# Altium PCB STM32F103C8T6核心板.PcbDoc
Units mm, origin at the board's own origin, x right, y up, seen from the top; angles counter-clockwise.
Board outline 53.34 x 21.36 mm, 2 copper layers (Top Layer, Bottom Layer); 35 components, 50 nets, 168 pads, 26 vias.
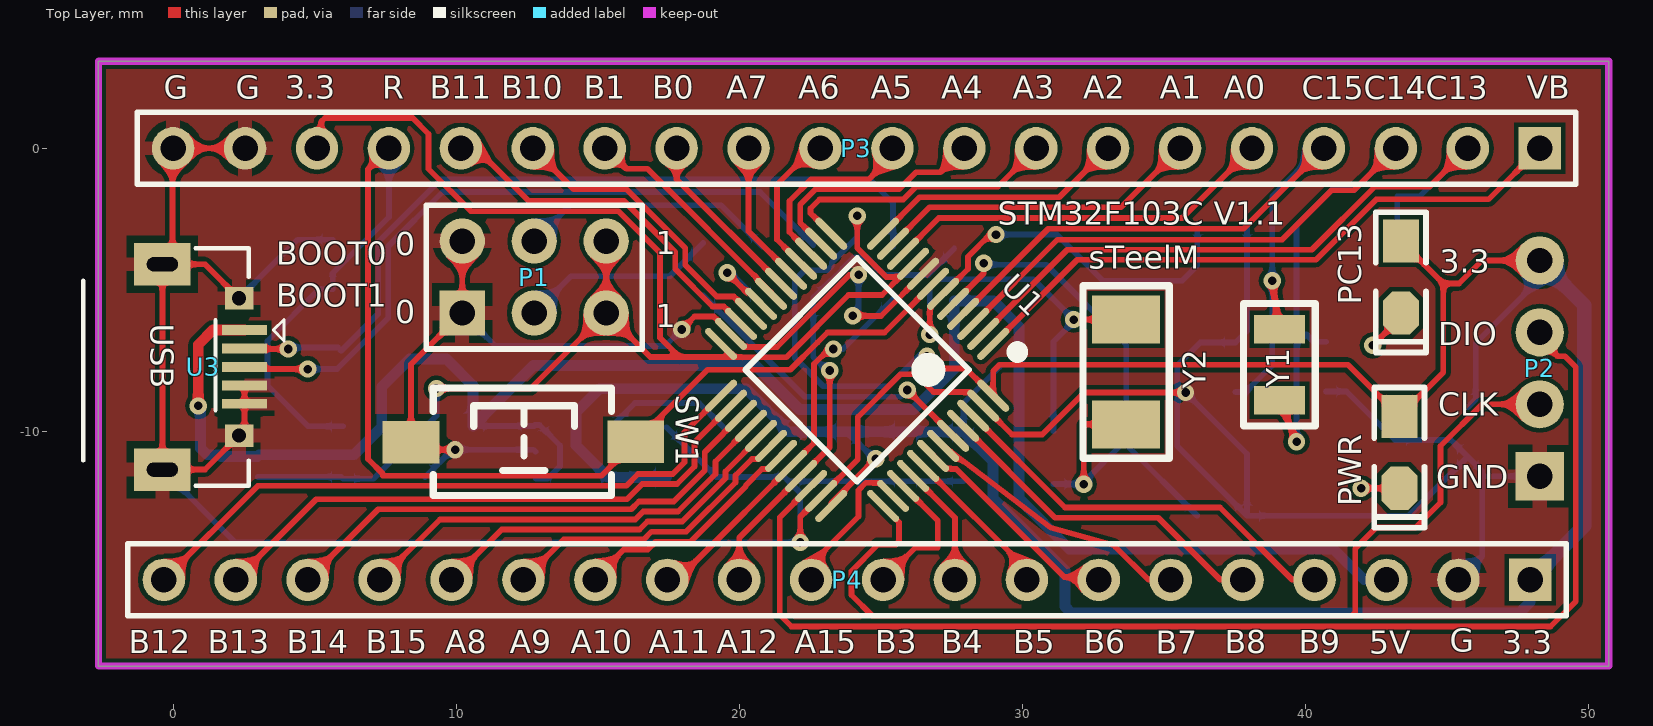
[diagram p0: Top Layer view]
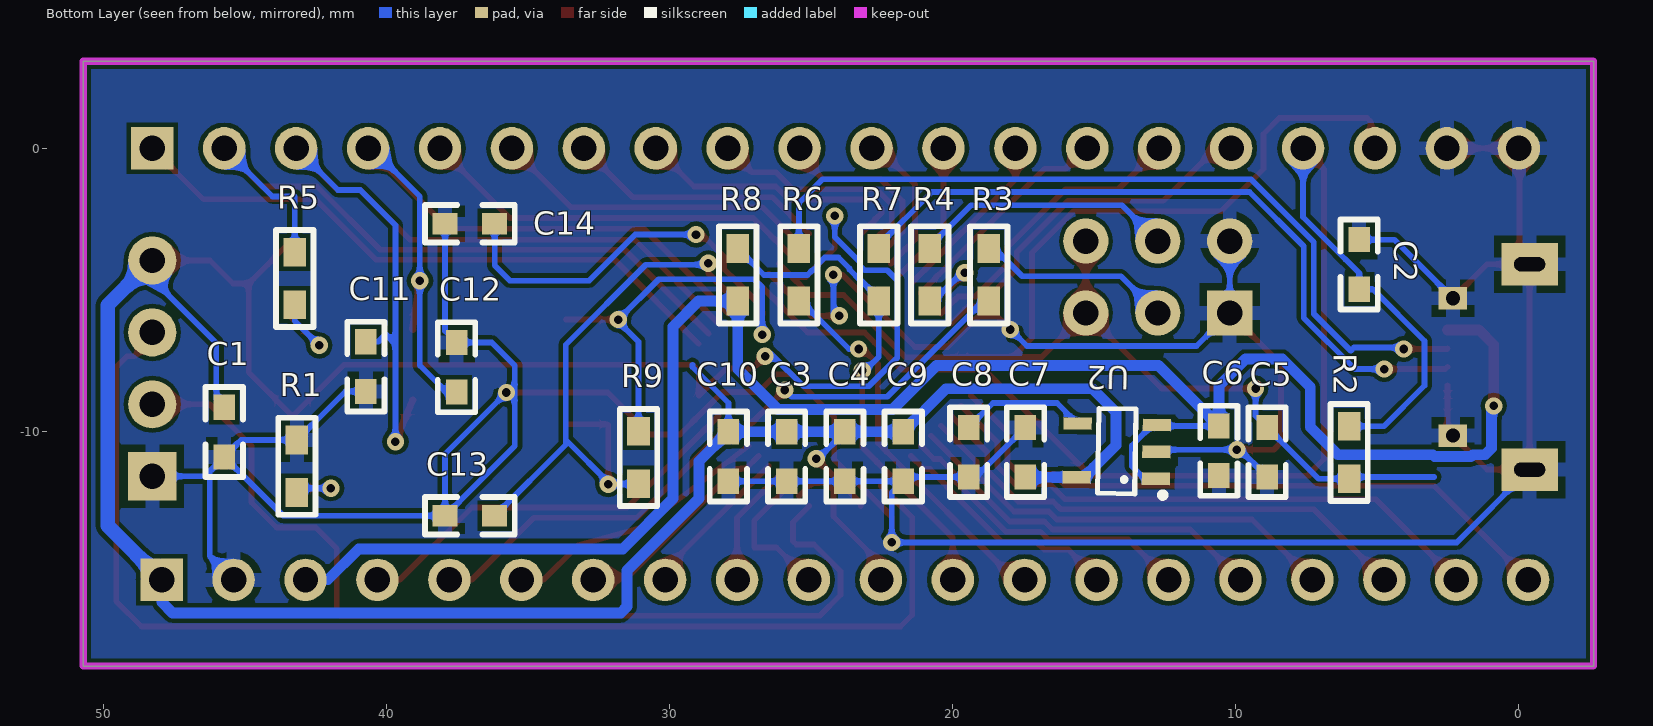
[diagram p1: Bottom Layer view, seen from below]

## Layer stack, top to bottom
Top Solder: solder mask 0.0102, Solder Resist, Dk 3.5
Top Layer: signal copper 0.0356
Dielectric1: dielectric 0.32, FR-4, Dk 4.8
Bottom Layer: signal copper 0.0356
Bottom Solder: solder mask 0.0102, Solder Resist, Dk 3.5

## Board outline
-2.642,-18.288 -2.642,3.073 50.698,3.073 50.698,-18.288

## Design rules (kind name [scope] priority, off if disabled: settings)
Clearance [All] p1: gap=0.152 ignorepadtopadclearanceinfootprint=FALSE except(0: Arc-Hole Track-Hole SMDPad-Hole THPad-Hole Via-Hole Fill-Hole Poly-Hole Region-Hole Text-Hole)
FabricationTestPointUsage TestPointUsage [All] p1: valid=0 allowmultiple=FALSE
FabricationTestpoint Testpoint [(IsPad And (OnTopLayer Or OnBottomLayer))] p1: side=3 testpointundercomponent=TRUE minsize=1.016 maxsize=2.54 preferedsize=1.524 minholesize=0 maxholesize=1.016 preferedholesize=0.813 testpointgrid=0.025 allowsidetop=TRUE allowsidebottom=TRUE usegrid=TRUE gridtolerance=0
HoleToHoleClearance [All] p1: gap=0 allowstackedmicrovias=TRUE
MinimumSolderMaskSliver [All] p1: minsoldermaskwidth=0
PolygonConnect PolygonConnect_1 [All vs (InPadClass('All Pads'))] p1: connectstyle=Relief reliefconductorwidth=0.508 reliefentries=4 polygonreliefangle="90 Angle" airgapwidth=0.254
PolygonConnect [All] p2: connectstyle=Direct reliefconductorwidth=0.508 reliefentries=4 polygonreliefangle="90 Angle" airgapwidth=0.254
RoutingVias [All] p1: holewidth=0.305 width=0.61 viastyle="Through Hole" minholewidth=0.305 minwidth=0.61 maxholewidth=1.27 maxwidth=2.54
SilkToSilkClearance [All] p1: silktosilkclearance=0
SilkToSolderMaskClearance SilkscreenOverComponentPads [IsPad] p1: minsilkscreentomaskgap=0 clearancetoexposedcopper=TRUE
SolderMaskExpansion [All] p1: expansion=0.102 istentingtop=FALSE
Width [All] p1: maxlimit=0.508 minlimit=0.152 preferedwidth=0.203
24 further rules are at their usual default settings.

## Components (designator, comment, footprint, x,y, rotation, side; value= is the part's Value field where it differs from the comment)
C1 "104,0603" "C 0603" 45.72,-10.008 r90 bottom value=104
C2 "105,0603" "C 0603" 5.639,-4.115 r270 bottom value=104
C3 "105,0603" "C 0603" 25.857,-10.871 r90 bottom value=104
C4 "105,0603" "C 0603" 23.8,-10.871 r90 bottom value=104
C5 "106,0603" "C 0603" 8.89,-10.744 r270 bottom value=104
C6 "105,0603" "C 0603" 10.592,-10.668 r90 bottom value=104
C7 "104,0603" "C 0603" 17.424,-10.744 r270 bottom value=104
C8 "223,0603" "C 0603" 19.431,-10.719 r90 bottom value=104
C9 "105,0603" "C 0603" 21.742,-10.871 r90 bottom value=104
C10 "105,0603" "C 0603" 27.915,-10.871 r90 bottom value=104
C11 "22P,0603" "C 0603" 40.716,-7.722 r270 bottom value=104
C12 "22P,0603" "C 0603" 37.516,-7.722 r90 bottom value=104
C13 "22P,0603" "C 0603" 37.059,-12.979 r0 bottom value=104
C14 "22P,0603" "C 0603" 37.059,-2.667 r0 bottom value=104
P1 "Header 3X2" HDR-3X2 10.211,-5.817 r0 top
P2 "SWD" HDR-1X4_H 48.26,-11.583 r90 top
P3 "Header 20" HDR1X20 48.26,0 r180 top
P4 "Header 20" HDR1X20 47.93,-15.24 r180 top
PC13 "LED" "LED 0805G" 43.358,-4.547 r270 top
PWR "LED" "LED 0805G" 43.307,-10.736 r270 top
R1 "510R,0603" "R 0603" 43.155,-11.227 r90 bottom
R2 "10K,0603" "R 0603" 5.994,-10.744 r270 bottom
R3 "10K,0603" "R 0603" 18.72,-4.47 r90 bottom
R4 "10K,0603" "R 0603" 20.803,-4.47 r270 bottom
R5 "510R,0603" "R 0603" 43.231,-4.597 r90 bottom
R6 "20R,0603" "R 0603" 25.425,-4.47 r270 bottom
R7 "20R0603" "R 0603" 22.606,-4.47 r270 bottom
R8 "1.5K,0603" "R 0603" 27.584,-4.47 r90 bottom
R9 "1M0603" "R 0603" 31.09,-10.922 r270 bottom
SW1 "SW-PB_V" "TSW SMD-3*6*2.5" 12.395,-10.363 r0 top
U1 "STM32F103C8T6" "TQFP48 7x7_L" 24.155,-7.823 r135 top locked
U2 "RT9193" SOT23-5L 14.199,-10.693 r91 bottom
U3 "USB-mrico" USB-micro_B -0.381,-7.722 r270 top
Y1 "32.768K" XTAL-3215 39.065,-7.645 r270 top
Y2 "8M" XTAL-5032 33.655,-7.899 r270 top

## Footprints (in the part's own frame and the unit in brackets; to place one, negate y for a bottom-side part, rotate by r counter-clockwise, add the part's x,y. Pads: shape width x height; smd on the part's side, far side on the other; paste and mask are expansions set on the pad)
"C 0603" [mil] "无极性贴片电容"
  rect 35x30 smd: 1(-35,0) 2(34,0)
  silkscreen extent -63,-26 62,26, body extent -31,-16 31,16, height 32
HDR1X20 [mm] "Connector; Header; 20 Position"
  rect 1.5x1.5 hole 0.9: 1(0,0)
  round 1.5 hole 0.9: 2(2.54,0) 3(5.08,0) 4(7.62,0) 5(10.16,0) 6(12.7,0) 7(15.24,0) 8(17.78,0) 9(20.32,0) 10(22.86,0) 11(25.4,0) 12(27.94,0) 13(30.48,0) 14(33.02,0) 15(35.56,0) 16(38.1,0) 17(40.64,0) 18(43.18,0) 19(45.72,0) 20(48.26,0)
  silkscreen extent -1.27,-1.27 49.53,1.27
HDR-1X4_H [mm] "弯脚排针，4脚"
  rect 1.7x1.7 hole 0.9: 1(0,0)
  round 1.7 hole 0.9: 2(2.54,0) 3(5.08,0) 4(7.62,0)
  body extent -1.27,-7.77 8.89,1.27, height 4.85
HDR-3X2 [mm] "双排排针，3x2脚"
  rect 1.6x1.6 hole 0.9: 1(0,0)
  round 1.6 hole 0.9: 2(0,2.54) 3(2.54,0) 4(2.54,2.54) 5(5.08,0) 6(5.08,2.54)
  silkscreen extent -1.27,-1.27 6.35,3.81, body extent -1.27,-1.27 6.35,3.81, height 8.5
"LED 0805G" [mil] "绿色0805LED"
  rect 60x50 smd: 1(-50,0)
  oct 60x50 smd: 2(50,0)
  silkscreen extent -90,-35 105,35, body extent -39,-25 39,25, height 32
"R 0603" [mil] "1/10W贴片电阻"
  rect 40x31.5 smd: 1(-36.5,0) 2(36.5,0)
  silkscreen extent -68,-26 68,26, body extent -31,-16 31,16, height 16
SOT23-5L [mm] "3x1.6x1.1mm(长宽高)"
  rect 0.45x1 smd: 1(-0.95,-1.4) 2(0,-1.4) 3(0.95,-1.4) 4(0.95,1.4) 5(-0.95,1.4)
  silkscreen extent -1.6,-1.73 1.5,0.66, body extent -1.5,-1.4 1.5,1.4, height 1.15
"TQFP48 7x7_L" [mm] "48脚，体宽：7x7mm, 脚距：0.5mm"
  oval 0.25x1.5 smd: 1(-2.75,-4.046) 2(-2.25,-4.046) 3(-1.75,-4.046) 4(-1.25,-4.046) 5(-0.75,-4.046) 6(-0.25,-4.046) 7(0.25,-4.046) 8(0.75,-4.046) 9(1.25,-4.046) 10(1.75,-4.046) 11(2.25,-4.046) 12(2.75,-4.046) 25(2.75,4.046) 26(2.25,4.046) 27(1.75,4.046) 28(1.25,4.046) 29(0.75,4.046) 30(0.25,4.046) 31(-0.25,4.046) 32(-0.75,4.046) 33(-1.25,4.046) 34(-1.75,4.046) 35(-2.25,4.046) 36(-2.75,4.046)
  oval 1.5x0.25 smd: 13(4.046,-2.75) 14(4.046,-2.25) 15(4.046,-1.75) 16(4.046,-1.25) 17(4.046,-0.75) 18(4.046,-0.25) 19(4.046,0.25) 20(4.046,0.75) 21(4.046,1.25) 22(4.046,1.75) 23(4.046,2.25) 24(4.046,2.75) 37(-4.046,2.75) 38(-4.046,2.25) 39(-4.046,1.75) 40(-4.046,1.25) 41(-4.046,0.75) 42(-4.046,0.25) 43(-4.046,-0.25) 44(-4.046,-0.75) 45(-4.046,-1.25) 46(-4.046,-1.75) 47(-4.046,-2.25) 48(-4.046,-2.75)
  silkscreen extent -3.68,-4.57 2.79,2.79, body extent -4.5,-4.5 4.5,4.5, height 1.05
"TSW SMD-3*6*2.5" [mm] "3*6*2.5mm"
  rect 2x1.5 smd: 1(-3.996,-0.02) 2(3.937,0)
  silkscreen extent -3.21,-1.9 3.09,1.9, body extent -4,-1.88 4,1.62, height 2.59
USB-micro_B [mm] "micro型USB ，5.7*7.8*2.5mm"
  rect 0.35x1.6 smd: 1(-1.3,2.9) 2(-0.65,2.9) 3(0,2.9) 4(0.65,2.9) 5(1.3,2.9)
  rect 1.5x2 hole 0.5 slot 1.1 at 90 deg: 5(-3.625,0) 5(3.625,0)
  rect 0.8x1 hole 0.5: 5(-2.425,2.71) 5(2.425,2.71)
  silkscreen extent -4.19,-2.79 4.19,4.3, body extent -4,-2.71 4,2.89, height 2.8
XTAL-3215 [mm]
  rect 1x1.8 smd: 1(-1.25,0) 2(1.25,0)
  silkscreen extent -2.16,-1.27 2.16,1.27
XTAL-5032 [mm]
  rect 1.7x2.4 smd: 1(-1.85,0) 2(1.85,0)
  silkscreen extent -3.05,-1.52 3.05,1.52

## Part data
C1 C2 C3 C4 C5 C6 C7 C8 C9 C10 C11 C12 C13 C14: library part Cap, "Capacitor", LatestRevisionDate=17-Jul-2002, LatestRevisionNote="Re-released for DXP Platform.", Published=8-Jun-2000, Publisher="Altium Limited"
P1: "Header, 3-Pin, Dual row", LatestRevisionDate=17-Jul-2002, LatestRevisionNote="Re-released for DXP Platform.", Publisher="Altium Limited"
P2: library part "Header 4", "Header, 4-Pin", LatestRevisionDate=17-Jul-2002, LatestRevisionNote="Re-released for DXP Platform.", Publisher="Altium Limited"
P3 P4: "Header, 20-Pin", LatestRevisionDate=17-Jul-2002, LatestRevisionNote="Re-released for DXP Platform.", Publisher="Altium Limited"
R1 R2 R3 R4 R5 R6 R7 R8 R9: library part Res2, "Resistor", LatestRevisionDate=17-Jul-2002, LatestRevisionNote="Re-released for DXP Platform.", Published=8-Jun-2000, Publisher="Altium Limited"
SW1: "SWITCH"
U2: library part RT9193X_5P, ICA_MFR_NAME=RICHTEK, ICA_PARTNUM=$$2191094$$RT9193-15CU5, Part Number=TMP-13
U3: library part usb-STM
Y1 Y2: library part XTAL, "Crystal Oscillator", LatestRevisionDate=17-Jul-2002, LatestRevisionNote="Re-released for DXP Platform.", Published=8-Jun-2000, Publisher="Altium Limited"

## Via types
v1: diameter 0.61, hole 0.305, Top Layer to Bottom Layer, 26 vias

## Nets (pads, with @x,y where several pads share a name; then routed paths per layer and width w, separated by ;. In a path a pad name is that pad's centre, name@x,y a point inside that pad or via, vN(x,y) a via of type N, cw(c..) or ccw(c..) an arc to the next point about the centre after c; other vN are vias at no path point)
5V: C6.2 P4.3 R8.1 U2.1 U2.3 U3.1 | length 68.9
  Top Layer w0.381: v1(0.884,-9.098) 0.884,-6.939 1.402,-6.422 U3.1
  Bottom Layer w0.203: C6.2 12.746,-9.804 U2.3 12.938,-9.768 13.665,-10.495 13.665,-11.227 13.224,-11.668 U2.1
  Bottom Layer w0.381: v1(0.884,-9.098) 0.962,-9.175 0.962,-10.592 1.19,-10.82 1.618,-10.82 1.687,-10.89 2.971,-10.89 3.04,-10.82 6.384,-10.82 7.366,-9.839 7.366,-8.433 8.357,-7.442 9.652,-7.442 10.592,-8.382 C6.2 12.725,-7.671 20.568,-7.671 22.117,-9.22 26.157,-9.22 27.584,-7.793 R8.1 28.969,-5.398 29.87,-6.299 29.87,-12.37 31.648,-14.147 40.969,-14.147 42.062,-15.24 P4.3
BOOT0: R3.1 U1.44 | length 11.1
  Top Layer w0.203: v1(25.927,-8.534) U1.44
  Bottom Layer w0.203: R3.1@18.72,-5.194 22.301,-8.776 25.686,-8.776 v1(25.927,-8.534)
BOOT1: R4.2 U1.20 | length 3.4
  Top Layer w0.203: v1(19.565,-4.4) 20.207,-5.042 20.313,-5.042 U1.20
  Bottom Layer w0.203: v1@19.558,-4.343 19.621,-4.343 20.625,-5.347 20.698,-5.422 R4.2@20.803,-5.531
GND: C1.1 C2.1 C3.1 C4.1 C5.2 C6.1 C7.1 C8.1 C9.1 C10.1 C11.2 C12.2 C13.2 C14.2 P1.1 P1.2 P2.1 P3.19 P3.20 P4.2 R1.2 SW1.1 U1.8 U1.23 U1.35 U1.47 U2.2 U3.4 U3.5 | length 161
  Top Layer w0.203: P3.20@-0.381,0.406 0.357,0.406 0.515,0.248 P3.20@0.599,0.248 ; U3.5@2.329,-5.297 1.129,-4.097 U3.5@-0.381,-4.097 ; U3.4 2.519,-9.022 2.519,-9.957 2.329,-10.147 1.129,-11.347 -0.381,-11.347 U3.5@-0.381,-4.097 ; P3.19 P3.20 -0.024,-0.024 -0.024,-3.739 U3.5@-0.381,-4.097 ; v1(9.957,-10.643) 8.659,-10.643 SW1.1 8.399,-7.628 P1.1 P1.2 ; v1(17.958,-6.401) 18.415,-5.944 19.094,-5.944 U1.23 20.171,-7.021 21.326,-7.021 23.876,-4.47 v1(24.206,-4.47) ; v1(22.149,-13.919) 22.149,-13.012 U1.35 24.181,-10.98 24.181,-9.491 25.696,-7.976 26.213,-7.976 26.848,-8.611 28.125,-8.611 U1.47 29.623,-10.109 30.694,-10.109 32.177,-8.627 v1(35.754,-8.627) ; v1(24.003,-5.918) 25,-5.918 U1.8
  Bottom Layer w0.203: U3.5@-0.381,-11.347 2.192,-13.919 v1(22.149,-13.919) 22.149,-12.167 C9.1 ; U3.5@2.329,-5.297 4.4,-3.226 C2.1 ; C5.2 9.855,-10.643 v1(9.957,-10.643) 12.724,-10.643 U2.2 ; P1.2 P1.1 11.379,-6.985 17.374,-6.985 v1(17.958,-6.401) ; C7.1 19.177,-11.608 C8.1 21.59,-11.608 C9.1 ; v1(24.003,-5.918) 24.206,-5.715 v1(24.206,-4.47) ; C10.1 C3.1 C4.1 C9.1 ; v1(35.754,-8.627) 37.922,-10.795 C13.2 ; C14.2 37.922,-6.452 C12.2 36.271,-6.858 35.458,-7.671 35.458,-10.516 C13.2 ; C11.2 41.44,-8.585 R1.2 45.123,-10.3 C1.1 ; P4.2 46.228,-14.402 46.228,-11.583 ; P2.1 46.228,-11.583 ; C13.2 43.637,-12.979 C1.1 ; C1.1 46.228,-11.405 46.228,-11.583
NetC8_2: C8.2 U2.4 | length 4.5
  Bottom Layer w0.203: U2.4 16.309,-8.992 18.567,-8.992 C8.2
NetP1_3: P1.3 R3.2 | length 7
  Bottom Layer w0.203: P1.3 14.046,-4.521 17.539,-4.521 R3.2@18.72,-3.34
NetP1_4: P1.4 R4.1 | length 9.2
  Bottom Layer w0.203: P1.4 14.017,-2.011 19.346,-2.011 R4.1@20.803,-3.467
NetPC13_2: PC13.2 R5.1 | length 3.3
  Top Layer w0.203: v1(42.367,-6.96) 43.358,-5.969 PC13.2
  Bottom Layer w0.203: v1(42.367,-6.96) 43.231,-6.096 R5.1
NetPWR_2: PWR.2 R1.1 | length 2.6
  Top Layer w0.203: v1(41.953,-12.006) PWR.2
  Bottom Layer w0.203: v1(41.953,-12.006) 43.007,-12.006 R1.1
NetR6_1: R6.1 U3.2 | length 28.9
  Top Layer w0.203: U3.2 2.534,-7.087 v1(4.064,-7.087)
  Bottom Layer w0.203: v1(4.064,-7.087) 4.115,-7.036 5.821,-7.036 5.933,-7.148 7.239,-5.842 7.239,-3.313 9.458,-1.094 24.589,-1.094 25.425,-1.93 R6.1@25.425,-3.467
NetR7_1: R7.1 U3.3 | length 25
  Top Layer w0.203: U3.3 2.595,-7.798 v1(4.75,-7.798)
  Bottom Layer w0.203: v1(4.75,-7.798) 5.786,-7.798 7.595,-5.989 7.595,-3.461 9.516,-1.539 20.729,-1.539 R7.1@22.606,-3.416
OSCIN: C13.1 R9.2 U1.5 Y2.2 | length 23.1
  Top Layer w0.203: U1.5 28.626,-4.414 v1(28.626,-4.064) ; v1(32.156,-11.862) 32.156,-9.775 32.182,-9.749 Y2.2
  Bottom Layer w0.203: v1(28.626,-4.064) 28.626,-4.115 30.836,-4.115 33.655,-6.934 33.655,-10.299 ; v1(32.156,-11.862) 31.09,-11.862 R9.2 32.105,-11.849 33.655,-10.299 ; C13.1 33.655,-10.465 33.655,-10.299
OSCOUT: C14.1 R9.1 U1.6 Y2.1 | length 27.7
  Top Layer w0.203: v1(26.721,-6.579) 26.721,-5.611 U1.6 28.067,-4.265 28.067,-3.833 28.852,-3.048 v1(29.058,-3.048) ; v1(31.805,-6.05) v1@31.873,-6.05 ; v1@31.839,-6.083 v1@31.873,-6.05 ; Y2.1 v1@31.873,-6.05
  Bottom Layer w0.203: v1(26.721,-6.579) 26.721,-4.91 27.008,-4.623 30.378,-4.623 v1(31.805,-6.05) 31.805,-6.117 31.09,-6.833 R9.1 ; v1(29.058,-3.048) 31.204,-3.048 32.829,-4.674 35.636,-4.674 36.17,-4.14 C14.1
PA0: P3.5 U1.10 | length 13.9
  Top Layer w0.203: U1.10 27.04,-2.464 35.636,-2.464 P3.5
PA1: P3.6 U1.11 | length 11.5
  Top Layer w0.203: U1.11 26.714,-2.083 33.477,-2.083 P3.6
PA2: P3.7 U1.12 | length 9.2
  Top Layer w0.203: U1.12 25.946,-2.144 26.362,-1.727 31.293,-1.727 P3.7
PA3: P3.8 U1.13 | length 10
  Top Layer w0.203: U1.13 22.512,-2.291 22.512,-2.122 22.828,-1.806 25.781,-1.806 26.24,-1.346 29.134,-1.346 P3.8
PA4: P3.9 U1.14 | length 8.3
  Top Layer w0.203: U1.14 22.149,-2.635 22.149,-1.982 22.681,-1.45 25.634,-1.45 26.235,-0.849 27.091,-0.849 P3.9
PA5: P3.10 U1.15 | length 6.7
  Top Layer w0.203: U1.15 21.768,-2.961 21.768,-1.86 22.534,-1.094 24.57,-1.094 25.4,-0.264 P3.10
PA6: P3.11 U1.16 | length 5.2
  Top Layer w0.203: U1.16 21.326,-3.226 21.326,-1.28 22.606,0 P3.11
PA7: P3.12 U1.17 | length 5.1
  Top Layer w0.203: P3.12 20.32,-2.927 U1.17
PA8: P4.16 U1.29 | length 13.2
  Top Layer w0.203: P4.16 11.608,-13.462 16.469,-13.462 16.749,-13.183 17.976,-13.183 19.507,-11.651 19.507,-11.411 U1.29
PA9: P4.15 U1.30 | length 10.8
  Top Layer w0.203: P4.15 13.792,-13.818 16.617,-13.818 16.896,-13.538 18.123,-13.538 19.863,-11.799 19.863,-11.558 20.446,-10.975 20.65,-10.975 U1.30
PA10: P4.14 U1.31 | length 8.4
  Top Layer w0.203: P4.14 14.91,-15.179 15.916,-14.173 16.764,-14.173 17.043,-13.894 18.27,-13.894 20.218,-11.946 20.218,-11.91 20.8,-11.328 21.004,-11.328 U1.31
PA11: P4.13 R6.2 U1.32 | length 13.7
  Top Layer w0.203: P4.13 17.799,-15.24 22.631,-10.408 22.631,-7.617 23.162,-7.087 v1(23.317,-7.087)
  Bottom Layer w0.203: v1(23.317,-7.087) 23.66,-7.087 R6.2@25.425,-5.321
PA12: P4.12 R7.2 R8.2 U1.33 | length 17.8
  Top Layer w0.203: P4.12 19.99,-13.757 U1.33 23.19,-10.556 v1(23.19,-7.849)
  Bottom Layer w0.203: v1(23.19,-7.849) 23.089,-7.849 22.606,-7.366 22.606,-5.271 22.625,-5.271 23.235,-4.661 23.259,-4.661 23.642,-4.277 23.642,-4.244 24.026,-3.861 24.511,-3.861 24.771,-4.121 24.771,-4.157 24.92,-4.305 24.956,-4.305 25.121,-4.47 26.657,-4.47 R8.2
PA15: P4.11 U1.38 | length 5.4
  Top Layer w0.203: P4.11 22.53,-14.681 24.206,-13.005 24.206,-12.075 24.473,-11.808 24.958,-11.808 U1.38
PB0: P3.13 U1.18 | length 6.3
  Top Layer w0.203: P3.13 17.78,-1.094 U1.18
PB1: P3.14 U1.19 | length 8
  Top Layer w0.203: P3.14 15.284,0 16.008,-0.724 16.751,-0.724 21.118,-5.09 U1.19
PB3: P4.10 U1.39 | length 5.1
  Top Layer w0.203: P4.10 26.213,-14.097 27,-14.097 27,-13.143 U1.39
PB4: P4.9 U1.40 | length 4.3
  Top Layer w0.203: U1.40 27.61,-13.045 P4.9
PB5: P4.8 U1.41 | length 5.5
  Top Layer w0.203: U1.41 30.15,-14.878 P4.8
PB6: P4.7 U1.42 | length 7.7
  Top Layer w0.203: U1.42 27.29,-11.312 27.462,-11.312 27.478,-11.328 27.658,-11.328 31.471,-15.141 32.591,-15.141 P4.7
PB7: P4.6 U1.43 | length 9.6
  Top Layer w0.203: U1.43 30.998,-13.401 33.223,-14.021 33.283,-14.08 34.442,-15.24 P4.6
PB8: P4.5 U1.45 | length 12.1
  Top Layer w0.203: U1.45 31.145,-13.045 34.788,-13.045 36.982,-15.24 P4.5
PB9: P4.4 U1.46 | length 14.5
  Top Layer w0.203: U1.46 31.497,-12.69 36.972,-12.69 39.522,-15.24 P4.4
PB10: P3.15 U1.21 | length 10.5
  Top Layer w0.203: P3.15 14.148,-1.448 16.012,-1.448 18.085,-3.52 18.085,-4.12 19.197,-5.232 19.797,-5.232 U1.21
PB11: P3.16 U1.22 | length 12.8
  Top Layer w0.203: P3.16 10.693,0 12.548,-1.854 15.916,-1.854 17.729,-3.668 17.729,-4.267 19.05,-5.588 19.445,-5.588 U1.22
PB12: P4.20 U1.25 | length 23
  Top Layer w0.203: P4.20 2.988,-11.922 15.998,-11.922 16.415,-11.505 17.642,-11.505 18.059,-11.088 18.059,-10.03 U1.25
PB13: P4.19 U1.26 | length 20.5
  Top Layer w0.203: P4.19 5.055,-12.395 16.028,-12.395 16.563,-11.86 17.79,-11.86 18.415,-11.235 18.415,-10.382 U1.26
PB14: P4.18 U1.27 | length 18.1
  Top Layer w0.203: P4.18 7.239,-12.751 16.175,-12.751 16.454,-12.471 17.681,-12.471 18.771,-11.382 18.771,-10.733 U1.27
PB15: P4.17 U1.28 | length 15.6
  Top Layer w0.203: P4.17 9.423,-13.106 16.322,-13.106 16.602,-12.827 17.829,-12.827 19.152,-11.504 19.152,-11.059 U1.28
PC13: P3.2 R5.2 U1.2 | length 25
  Top Layer w0.203: U1.2 31.579,-3.581 40.208,-3.581 42.443,-1.346 44.374,-1.346 P3.2
  Bottom Layer w0.203: R5.2 43.231,-1.702 44.018,-1.702 P3.2
PC14: C11.1 P3.3 U1.3 Y1.2 | length 32.7
  Top Layer w0.203: U1.3 31.228,-3.226 39.167,-3.226 40.911,-1.481 41.699,-1.481 P3.3
  Top Layer w0.254: Y1.2 v1(39.675,-10.363)
  Bottom Layer w0.203: v1(39.675,-10.363) 39.675,-6.905 ; C11.1 40.284,-6.833 40.016,-6.564 39.675,-6.905 ; P3.3 41.707,-1.473 40.919,-1.473 39.675,-2.718 39.675,-6.905
PC15: C12.1 P3.4 U1.4 Y1.1 | length 27.1
  Top Layer w0.203: U1.4 30.902,-2.845 37.795,-2.845 P3.4
  Top Layer w0.254: v1(38.811,-4.674) Y1.1
  Bottom Layer w0.203: C12.1 37.874,-8.611 38.811,-7.674 v1(38.811,-4.674) 38.811,-1.702 40.513,0 P3.4
RESET: C2.2 P3.17 R2.1 SW1.2 U1.7 | length 48.6
  Top Layer w0.203: P3.17 6.883,-0.737 6.883,-10.976 7.4,-11.493 7.4,-11.566 15.129,-11.566 SW1.2 18.872,-7.823 21.793,-7.823 22.758,-6.858 22.758,-6.855 23.111,-6.502 25.123,-6.502 U1.7
  Bottom Layer w0.203: R2.1 4.763,-9.817 3.327,-8.382 3.327,-6.804 5.153,-4.978 C2.2 5.639,-4.399 6.114,-3.924 6.125,-3.924 7.62,-2.429 P3.17 P3.17@8.014,0.394
SWDCLK: P2.2 U1.37 | length 34.3
  Top Layer w0.203: U1.37 25.072,-12.641 25.634,-13.204 25.634,-13.876 25.515,-13.995 24.894,-13.995 23.952,-14.938 23.952,-15.773 24.689,-16.51 41.627,-16.51 41.746,-16.391 41.746,-14.132 42.489,-13.389 43.878,-13.389 44.755,-12.512 44.755,-10.516 46.228,-9.042 P2.2@47.93,-9.042
SWDIO: P2.3 U1.34 | length 43.8
  Top Layer w0.203: U1.34 21.426,-13.028 21.426,-16.485 21.832,-16.891 48.641,-16.891 49.53,-16.002 49.53,-7.722 49.149,-7.341 48.886,-7.341 48.26,-6.714 P2.3
VBAT: P3.1 U1.1 | length 22.2
  Top Layer w0.203: U1.1 31.931,-3.937 40.355,-3.937 42.489,-1.803 46.457,-1.803 P3.1
VCC3V3: C1.2 C3.2 C4.2 C5.1 C7.2 C9.2 C10.2 P1.5 P1.6 P2.4 P3.18 P4.1 PC13.1 PWR.1 R2.2 U1.9 U1.24 U1.36 U1.48 U2.5 | length 165.8
  Top Layer w0.203: P3.18 5.228,0.148 5.228,0.936 5.359,1.067 8.458,1.067 9.017,0.508 9.017,-0.726 10.513,-2.223 15.727,-2.223 17.196,-3.691 17.196,-6.688 17.882,-7.374 ; v1(9.296,-8.484) 12.624,-8.484 P1.5 ; P1.6 P1.5 ; U1.36 23.239,-12.539 v1(24.816,-10.962) v1@24.754,-10.962 ; v1(24.155,-2.388) 24.155,-3.521 25.18,-4.546 25.519,-4.546 25.519,-4.521 U1.9@25.69,-4.521 ; U1.9 U1.9@25.69,-4.521 ; v1(26.619,-7.341) 27.051,-7.772 27.994,-7.772 U1.48 28.961,-7.869 29.185,-7.645 41.486,-7.645 PWR.1 44.856,-7.917 44.856,-4.775 ; PC13.1 44.856,-4.775 ; P2.4 46.22,-3.962 45.408,-4.775 44.856,-4.775 ; P1.5 16.848,-7.374 17.882,-7.374 ; 17.882,-7.374 19.724,-7.374 19.726,-7.376 21.656,-7.376 23.851,-5.182 25.029,-5.182 U1.9@25.69,-4.521
  Bottom Layer w0.203: 2.997,-11.608 5.931,-11.608 R2.2 7.074,-11.671 C5.1 9.296,-9.449 v1(9.296,-8.484) ; C4.2 v1@24.754,-10.962 ; v1(24.155,-2.388) 24.155,-3.134 23.26,-4.03 23.26,-4.157 23.111,-4.305 22.304,-4.305 21.952,-4.657 21.952,-7.401 22.959,-8.407 25.264,-8.407 26.331,-7.341 v1(26.619,-7.341) ; C10.2 27.915,-8.992 29.185,-7.722 29.185,-7.645 ; C1.2 45.999,-8.865 45.999,-6.872 48.26,-4.611 P2.4
  Bottom Layer w0.381: C7.2 17.413,-11.619 U2.5 15.353,-11.619 14.224,-10.49 14.224,-9.322 15.052,-8.494 20.229,-8.494 C9.2 C4.2 C3.2 C10.2 28.956,-11.049 28.956,-12.37 31.497,-14.911 31.497,-16.185 31.72,-16.408 47.549,-16.408 47.93,-16.027 P4.1
  Bottom Layer w0.508: P4.1 49.835,-13.335 49.835,-5.537 P2.4

## Polygon pours and split planes (outlines as drawn)
GND on Top Layer "TOP" (solid, pour order 31): -2.642,-18.288 -2.642,3.073 50.698,3.073 50.698,-18.288
GND on Bottom Layer "BOTTOM" (solid, pour order 32): -2.642,-18.288 -2.642,3.073 50.698,3.073 50.698,-18.288

## Keep-outs
Keep-Out Layer:
  lines w0.254: -2.642,-18.288 -2.642,3.073 50.698,3.073 50.698,-7.645 50.698,-18.288 -2.641,-18.288

## Silkscreen, mask and mechanical layers (free items; w line width, h text height)
Top Overlay:
  text "G" at -0.33,1.753 h0.81
  text "G" at 2.21,1.753 h0.81
  text "3.3" at 3.962,1.753 h0.81
  text "R" at 7.391,1.753 h0.81
  text "B11" at 9.068,1.753 h0.81
  text "B10" at 11.582,1.753 h0.81
  text "B1" at 14.503,1.753 h0.81
  text "B0" at 16.916,1.753 h0.81
  text "A7" at 19.533,1.753 h0.81
  text "A6" at 22.073,1.753 h0.81
  text "A5" at 24.638,1.753 h0.81
  text "A4" at 27.127,1.753 h0.81
  text "A3" at 29.653,1.753 h0.81
  text "A2" at 32.138,1.753 h0.81
  text "A1" at 34.849,1.753 h0.81
  text "A0" at 37.109,1.753 h0.81
  text "VB" at 47.803,1.753 h0.81
  text "C15C14C13" at 39.853,1.727 h0.81
  text "STM32F103C V1.1" at 29.113,-2.693 h0.81
  text "BOOT0" at 3.632,-4.115 h0.81
  text "sTeelM" at 32.334,-4.248 h0.81
  text "3.3" at 44.729,-4.4 h0.81
  text "BOOT1" at 3.632,-5.589 h0.81
  text "DIO" at 44.679,-6.96 h0.81
  text "CLK" at 44.679,-9.449 h0.81
  text "GND" at 44.611,-12.006 h0.81
  text "G" at 45.085,-17.78 h0.81
  text "B12" at -1.575,-17.831 h0.81
  text "B13" at 1.219,-17.831 h0.81
  text "B14" at 4.013,-17.831 h0.81
  text "B15" at 6.807,-17.831 h0.81
  text "A8" at 9.601,-17.831 h0.81
  text "A9" at 11.887,-17.831 h0.81
  text "A10" at 14.046,-17.831 h0.81
  text "A11" at 16.789,-17.831 h0.81
  text "A12" at 19.202,-17.831 h0.81
  text "A15" at 21.946,-17.831 h0.81
  text "B3" at 24.79,-17.831 h0.81
  text "B4" at 27.127,-17.831 h0.81
  text "B5" at 29.667,-17.831 h0.81
  text "B6" at 32.156,-17.831 h0.81
  text "B8" at 37.135,-17.831 h0.81
  text "B9" at 39.751,-17.831 h0.81
  text "B7" at 34.696,-17.856 h0.81
  text "5V" at 42.24,-17.856 h0.81
  text "3.3" at 46.939,-17.856 h0.81
Bottom Solder:
  text "sTeeLM" at 3.404,-2.693 h0.81

## Text inside footprints (layer, text, board x,y; h text height)
P1: Top Overlay "0" at 7.849,-6.172 h0.81; Top Overlay "0" at 7.849,-3.785 h0.81; Top Overlay "1" at 17.043,-6.325 h0.81; Top Overlay "1" at 17.043,-3.734 h0.81
U3: Top Overlay "USB" at -0.783,-6.198 h0.81 r270